# Altium PCB AU0006A.pcbdoc
Units mil, origin at the board's own origin, x right, y up, seen from the top; angles counter-clockwise.
Board outline 6752.1 x 6043.45 mil, 4 copper layers (Top Layer, GND, PWR, Bottom Layer), stack 39.556 mil thick; 12 components, 40 nets, 194 pads, 0 vias.
Unrouted connection lines stored in the file: 38.
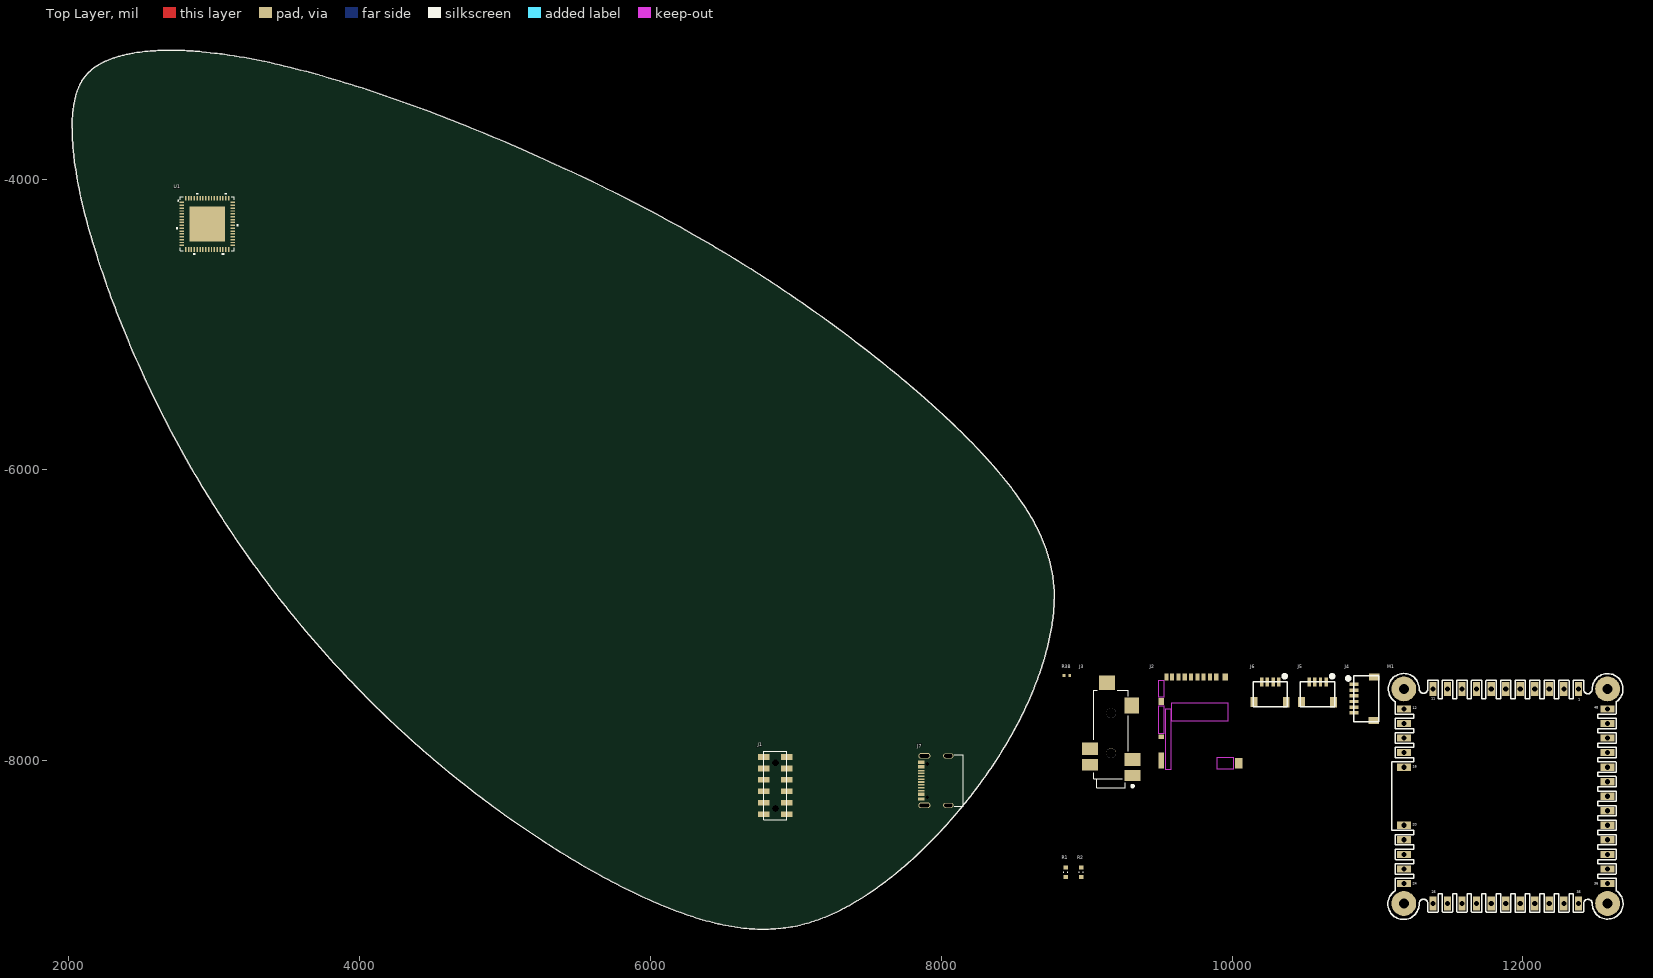
[diagram p0: Top Layer view]
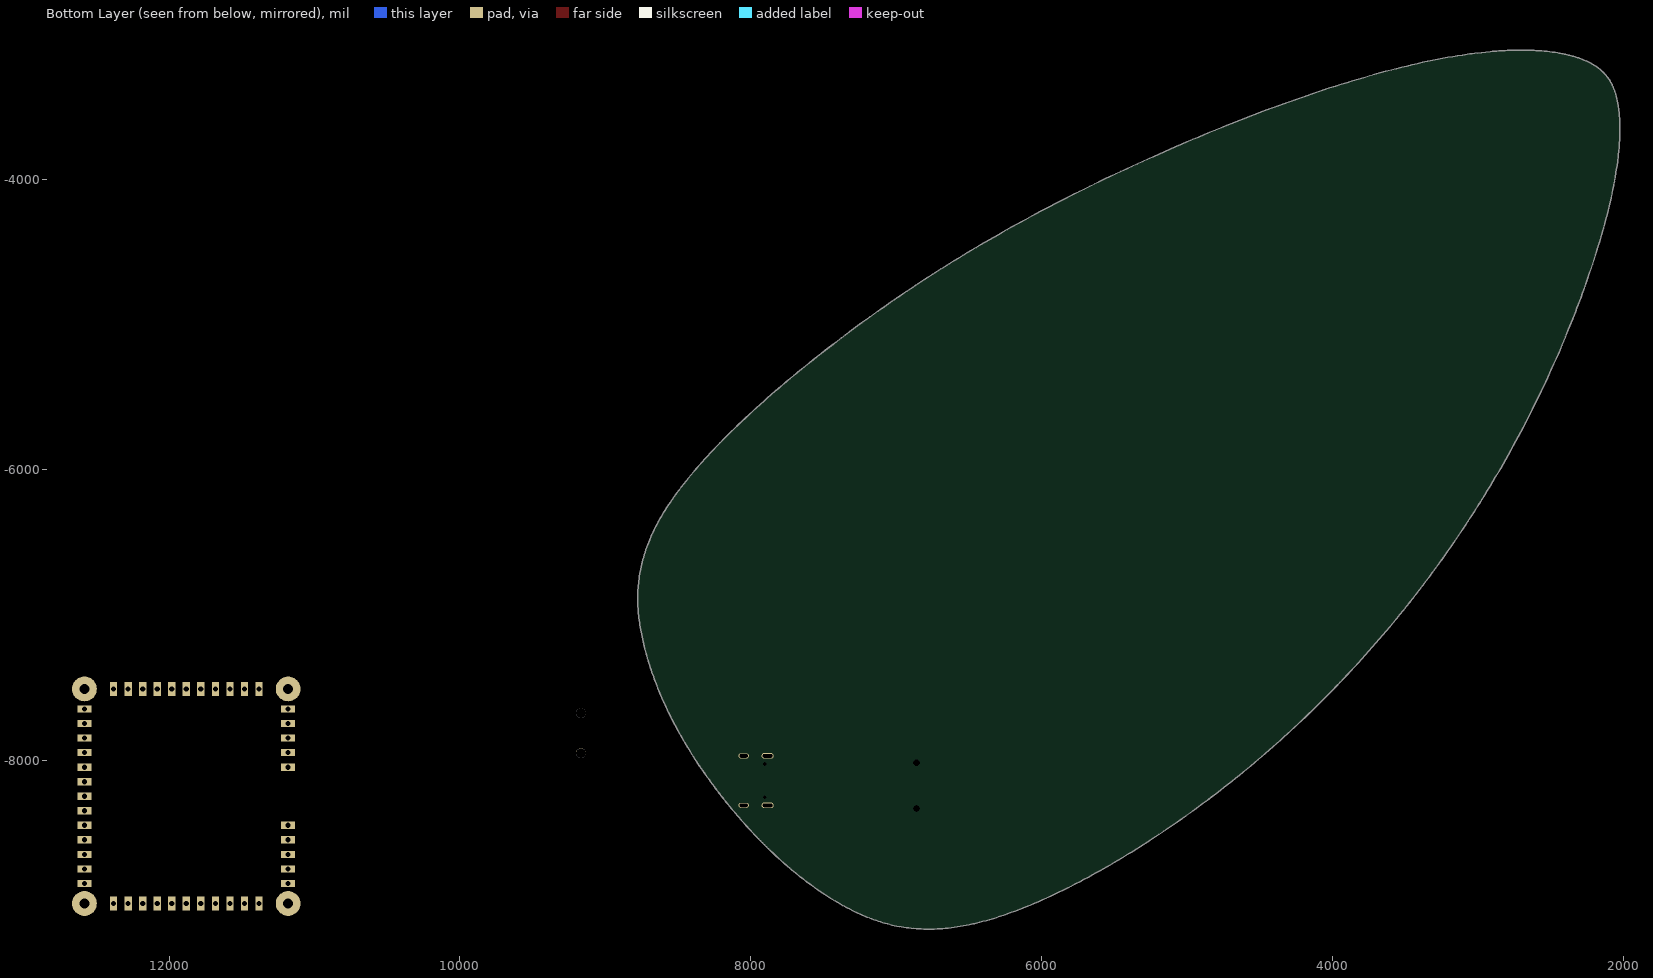
[diagram p1: Bottom Layer view, seen from below]

## Layer stack, top to bottom
Top Solder: solder mask 0.4, Solder Resist, Dk 3.5
Top Layer: signal copper 1.4
Dielectric 1: prepreg 2.8, PP-006, Dk 4.1
GND: signal copper 1.378
Dielectric1: dielectric 28.4, FR-4, Dk 4.8
PWR: signal copper 1.378
Dielectric 2: prepreg 2.8, PP-006, Dk 4.1
Bottom Layer: signal copper 1.4
Bottom Solder: solder mask 0.4, Solder Resist, Dk 3.5

## Board outline
795 vertices, not listed, extent 2025.34,-9156.87 8777.44,-3113.42

## Design rules (kind name [scope] priority, off if disabled: settings)
Clearance [All] p1: gap=5 ignorepadtopadclearanceinfootprint=FALSE except(8: Arc-Poly Track-Poly SMDPad-Poly THPad-Poly Via-Poly Fill-Poly Poly-Poly)
ComponentClearance ComponentClearance_1 [HasFootprint('ER-TFT1.54-1')] p1: gap=0 collisioncheckmode=3 verticalgap=0 showdistances=FALSE
ComponentClearance [All] p2: gap=10 collisioncheckmode=3 verticalgap=10 showdistances=FALSE
Height [All] p1: minheight=0 maxheight=5000 prefheight=500
PlaneClearance [All] p1: clearance=10
PolygonConnect PolygonConnect_2 [InNet('GND')] p1: thpad.connectstyle=Direct thpad.reliefconductorwidth=10 thpad.reliefentries=4 thpad.polygonreliefangle="90 Angle" thpad.airgapwidth=10 smdpad.connectstyle=Relief smdpad.reliefconductorwidth=10 smdpad.reliefentries=4 smdpad.polygonreliefangle="90 Angle" smdpad.airgapwidth=10 via.connectstyle=Direct via.reliefconductorwidth=10 via.reliefentries=4 via.polygonreliefangle="90 Angle" via.airgapwidth=10
PolygonConnect PolygonConnect_1 [IsVia] p2: connectstyle=Direct reliefconductorwidth=10 reliefentries=4 polygonreliefangle="90 Angle" airgapwidth=10
PolygonConnect [All] p3: connectstyle=Relief reliefconductorwidth=10 reliefentries=4 polygonreliefangle="90 Angle" airgapwidth=5
RoutingVias [All] p1: holewidth=12 width=26 viastyle="Through Hole" minholewidth=6 minwidth=6 maxholewidth=50 maxwidth=75
SilkToSolderMaskClearance SilkscreenOverComponentPads [IsPad] p1: minsilkscreentomaskgap=10 clearancetoexposedcopper=TRUE
SolderMaskExpansion [All] p1: expansion=4 istentingtop=FALSE
Width [All] p1: maxlimit=200 minlimit=5 preferedwidth=5
26 further rules are at their usual default settings.

## Classes and differential pairs
component class AU0005A_TOP_LEVEL: J1 J2 J3 J4 J5 J6 J7 M1 R1 R2 R38
component class U_ADC_IN: U1

## Components (designator, comment, footprint, x,y, rotation, side; value= is the part's Value field where it differs from the comment)
J1 "87759-1250" 87759-1250 6860,-8170 r90 top
J2 "DM3AT-SF-PEJM5" DM3AT-SF-PEJM5 9765.44,-8054.04 r0 top
J3 "SJ-43516-SMT" CUI_SJ-43516-SMT 9168.44,-7819.04 r90 top
J4 "SM6B-SRSS-TB(LF)(SN)" SM06B-SRSS-TB(LF)(SN) 10907.44,-7572.04 r90 top
J5 "SM04B-SRSS-TB(LF)(SN)" SM04B-SRSS-TB(LF)(SN) 10588.44,-7527.04 r0 top
J6 "SM04B-SRSS-TB(LF)(SN)" SM04B-SRSS-TB(LF)(SN) 10262.44,-7527.04 r0 top
J7 "=Value" 12402012E212A 8151.57,-8135.53 r90 top
M1 "SUPERMONKEY" SUPERMONKEY 11881.44,-8243.04 r0 top
R1 "5.1k" R0603_0.55MM_MD 8856.44,-8765.04 r90 top
R2 "5.1k" R0603_0.55MM_MD 8963.44,-8765.04 r90 top
R38 "10k" R0402_0.40MM_MD 8864.44,-7414.04 r0 top
U1 "AK5558VN" AK5558VN 2954,-4308 r0 top

## Footprints (in the part's own frame and the unit in brackets; to place one, negate y for a bottom-side part, rotate by r counter-clockwise, add the part's x,y. Pads: shape width x height; smd on the part's side, far side on the other; paste and mask are expansions set on the pad)
87759-1250 [mm] "CONN HEADER 12POS 2MM VERT SMD"
  rect 1x2 smd: 1(-5,-2) 2(-5,2) 3(-3,-2) 4(-3,2) 5(-1,-2) 6(-1,2) 7(1,-2) 8(1,2) 9(3,-2) 10(3,2) 11(5,-2) 12(5,2)
  round 0 hole 1.2 unplated: M1(-4,0) M2(4,0)
  silkscreen extent -5.92,-2.02 5.97,2.03, body extent -5.92,-2.75 5.98,2.75, height 6.45
12402012E212A [mm] "USB-C  2.0"
  round 0 hole 0.65: 71(2.89,6.28) ALIGN1(-2.89,6.28)
  rect 0.575x1.15 smd: A1B12(-3.2,7.355) A4B9(-2.4,7.355) B1A12(3.2,7.355) B4A9(2.4,7.355)
  rect 0.275x1.15 smd: A5(-1.25,7.355) A6(-0.25,7.355) A7(0.25,7.355) A8(1.25,7.355) B5(1.75,7.355) B6(0.75,7.355) B7(-0.75,7.355) B8(-1.75,7.355)
  oval 1x2.1 hole 0.6 slot 1.7 at 90 deg: M1(-4.32,6.78) M2(4.32,6.78)
  oval 0.9x1.8 hole 0.6 slot 1.4 at 90 deg: M3(-4.32,2.6) M4(4.32,2.6)
  silkscreen extent -4.47,-0.03 4.47,1.52, body extent -4.47,-0.02 4.47,7.58, height 3.27
AK5558VN [mil] "IC ADC, Audio 32 bit 768k DSD, PCM 64-QFN (9x9)"
  rect 31.68x10 smd paste+0 mask+0: 1(-176.16,147.64) 2(-176.16,127.95) 3(-176.16,108.27) 4(-176.16,88.58) 5(-176.16,68.9) 6(-176.16,49.21) 7(-176.16,29.53) 8(-176.16,9.84) 9(-176.16,-9.84) 10(-176.16,-29.53) 11(-176.16,-49.21) 12(-176.16,-68.9) 13(-176.16,-88.58) 14(-176.16,-108.27) 15(-176.16,-127.95) 16(-176.16,-147.64) 33(176.16,-147.64) 34(176.16,-127.95) 35(176.16,-108.27) 36(176.16,-88.58) 37(176.16,-68.9) 38(176.16,-49.21) 39(176.16,-29.53) 40(176.16,-9.84) 41(176.16,9.84) 42(176.16,29.53) 43(176.16,49.21) 44(176.16,68.9) 45(176.16,88.58) 46(176.16,108.27) 47(176.16,127.95) 48(176.16,147.64)
  rect 10x31.68 smd paste+0 mask+0: 17(-147.64,-176.16) 18(-127.95,-176.16) 19(-108.27,-176.16) 20(-88.58,-176.16) 21(-68.9,-176.16) 22(-49.21,-176.16) 23(-29.53,-176.16) 24(-9.84,-176.16) 25(9.84,-176.16) 26(29.53,-176.16) 27(49.21,-176.16) 28(68.9,-176.16) 29(88.58,-176.16) 30(108.27,-176.16) 31(127.95,-176.16) 32(147.64,-176.16) 49(147.64,176.16) 50(127.95,176.16) 51(108.27,176.16) 52(88.58,176.16) 53(68.9,176.16) 54(49.21,176.16) 55(29.53,176.16) 56(9.84,176.16) 57(-9.84,176.16) 58(-29.53,176.16) 59(-49.21,176.16) 60(-68.9,176.16) 61(-88.58,176.16) 62(-108.27,176.16) 63(-127.95,176.16) 64(-147.64,176.16)
  rect 242x242 smd paste-120.5 mask+0: 65(0,0)
  silkscreen extent -212,-212 212,212, body extent -180,-180 180,180, height 39
CUI_SJ-43516-SMT [mm]
  rect 2x2.8 smd: 1(-7.15,-3.7) 6(-5.25,3.7)
  rect 2.8x2.6 smd: 2(5.05,-3.6)
  rect 2.2x2.8 smd: 3(-2.45,3.7) 4(-4.35,-3.7)
  rect 2.6x2.8 smd: 5(9.05,0.75)
  round 1.7 hole 1.7 unplated: ""(-3.25,0) ""(3.75,0)
  silkscreen extent -9.25,-3.95 7.75,3, body extent -9.45,-4.5 7.75,4.5, height 5.08
DM3AT-SF-PEJM5 [mm] "Hirose DM3AT-SF-PEJM5 uSD connector - Normal Mount"
  rect 0.7x1.2 smd: 1(3.2,16.05) 2(2.1,16.05) 3(1,16.05) 4(-0.1,16.05) 5(-1.2,16.05) 6(-2.3,16.05) 7(-3.4,16.05) 8(-4.5,16.05) CDB(-5.45,16.05)
  rect 1x0.8 smd: CDA(-6.4,5.55)
  rect 1x2.8 smd: M(-6.4,1.4)
  rect 1x1.2 smd: M(-6.4,11.75) M(4.75,16.05)
  rect 1.3x1.9 smd: M(7.1,0.95)
  Top Layer keep-out region: -4.648,8.35 5.325,8.35 5.325,11.4 -4.648,11.4
  Top Layer keep-out region: -5.7,-0.1 -4.7,-0.1 -4.7,10.4 -5.7,10.4
  Top Layer keep-out region: -6.9,6.172 -5.9,6.172 -5.9,10.922 -6.9,10.922
  Top Layer keep-out region: -6.9,12.573 -5.9,12.573 -5.9,15.325 -6.9,15.325
  Top Layer keep-out region: 3.275,0 6.275,0 6.275,1.9 3.275,1.9
  body extent -6.49,0 7.36,16.15, height 1.68
R0402_0.40MM_MD [mm] "Resistor 0402 Medium Density"
  rect 0.45x0.55 smd: 1(-0.5,0) 2(0.5,0)
  body extent -0.5,-0.25 0.5,0.25, height 0.4
R0603_0.55MM_MD [mm] "Resistor 0603 Medium Density"
  rect 0.7x0.85 smd: 1(-0.825,0) 2(0.825,0)
  silkscreen extent -0.1,-0.33 0.1,0.33, body extent -0.8,-0.4 0.8,0.4, height 0.55
SM04B-SRSS-TB(LF)(SN) [mm] "CONN HEADR SH 4POS SIDE 1MM TIN"
  rect 0.6x1.55 smd: 1(-1.5,1.769) 2(-0.5,1.769) 3(0.5,1.769) 4(1.5,1.769)
  rect 1.2x1.8 smd: M1(2.8,-1.769) M2(-2.8,-1.719)
  silkscreen extent -3,-2.56 2.97,3.05, body extent -3,-2.64 3,2.31, height 2.91
SM06B-SRSS-TB(LF)(SN) [mm] "CONN HEADR SH 6POS SIDE 1MM TIN"
  rect 0.6x1.55 smd: 1(-2.5,1.769) 2(-1.5,1.769) 3(-0.5,1.769) 4(0.5,1.769) 5(1.5,1.769) 6(2.5,1.769)
  rect 1.2x1.8 smd: M1(3.8,-1.769) M2(-3.8,-1.719)
  silkscreen extent -4,-2.56 3.97,3.05, body extent -4,-2.44 4,2.51, height 2.97
SUPERMONKEY [mil]
  rect 50x95 hole 36: 1(500,737.5) 2(400,737.5) 3(300,737.5) 4(200,737.5) 5(100,737.5) 6(0,737.5) 7(-100,737.5) 8(-200,737.5) 9(-300,737.5) 10(-400,737.5) 11(-500,737.5) 25(-500,-737.5) 26(-400,-737.5) 27(-300,-737.5) 28(-200,-737.5) 29(-100,-737.5) 30(0,-737.5) 31(100,-737.5) 32(200,-737.5) 33(300,-737.5) 34(400,-737.5) 35(500,-737.5)
  round 170 hole 70: 2(-700,-737.5) 2(-700,737.5) 2(700,-737.5) 2(700,737.5)
  rect 95x50 hole 36: 12(-700,600) 13(-700,500) 14(-700,400) 15(-700,300) 16(-700,200) 20(-700,-200) 21(-700,-300) 22(-700,-400) 23(-700,-500) 24(-700,-600) 36(700,-600) 37(700,-500) 38(700,-400) 39(700,-300) 40(700,-200) 41(700,-100) 42(700,0) 43(700,100) 44(700,200) 45(700,300) 46(700,400) 47(700,500) 48(700,600)
  Top Layer lines w5: -700,-600 -699.68,-600.32 ; -700,-400 -686.73,-386.73 ; -700,-300 -697,-303 ; -700,200 -699.88,199.88 ; -700,400 -698.35,401.65 ; -409.45,-728.05 -400,-737.5 ; 100,-737.5 103,-734.5 ; 500,-737.5 505,-732.5 ; 696.57,-396.57 700,-400
  Top Layer lines w20: 498,735.5 500,737.5
  silkscreen extent -810,-847 807,844

## Part data
J1: "CONN HEADER 12POS 2MM VERT SMD", Color=Black, Manufacturer="Molex Connector Corporation", Supplier Part Number 1=WM18653-ND, Category="Connectors, Interconnects", ComponentLink1Description=http://www.molex.com/pdm_docs/sd/877591250_sd.pdf, ComponentLink1URL=http://www.molex.com/pdm_docs/sd/877591250_sd.pdf, Connector Type="Header, Unshrouded", Contact Finish=Gold, Contact Finish Thickness="15µin (0.38µm)", Contact Mating Length="0.150\" (3.81mm)", Contact Type="Male Pin", Fastening Type=-, Features="Board Guide", Manufacturer Part Number=87759-1250, Mounting Type="Surface Mount", Number of Positions=12, Number of Positions Loaded=All, Number of Rows=2, Packaging=Tube, Pitch="0.079\" (2.00mm)", Pricing 1="1=2.07, 10=1.823, 100=1.2155, 500=0.9724, 1000=0.80709 (USD)", RoHS="RoHS Compliant", Row Spacing="0.079\" (2.00mm)", Stock 1=1595, Supplier 1=Digi-Key, Termination=Solder
J2: "CONN MICRO SD R/A PUSH-PUSH SMD", Manufacturer="Hirose Electric Co Ltd", Supplier Part Number 1=HR1964CT-ND, Card Type="Secure Digital - microSD™", Category="Connectors, Interconnects", ComponentLink1Description=http://www.hirose.co.jp/cataloge_hp/e60900232.pdf, ComponentLink1URL=http://www.hirose.co.jp/cataloge_hp/e60900232.pdf, Connector Type="Connector and Ejector", Contact Finish=Gold, Contact Finish Thickness=-, Ejector Side=-, Features=Switch, Height Above Board="0.066\" (1.68mm)", Insertion, Removal Method="Push In, Push Out", Manufacturer Part Number=DM3AT-SF-PEJM5, Mounting Feature="Normal, Standard - Top", Mounting Type="Surface Mount, Right Angle", Number of Positions="10 (8 + 2)", Packaging="Cut Tape (CT)", Pricing="1=2.83, 10=2.72, 25=2.4932, 50=2.3798, 100=2.2664, 250=1.98312, 500=1.92648 (USD)", RoHS="RoHS Compliant", Stock=28699, Supplier 1=Digi-Key
J3: "Conn 3.5MM Audio Jack F 6 POS Solder RA SMD 6 Terminal 1 Port", Manufacturer="CUI Devices", Manufacturer Part Number=SJ-43516-SMT-TR, Package="3.5MM SMD R/A", Availability=Available, Price=$1.24
J4: library part SM06B-SRSS-TB(LF)(SN), "6 Positions Header, Shrouded Connector 0.039\" (1.00mm) Surface Mount, Right Angle Tin", Colour=Natural, Contact Resistance=40mR, Current Rating=1A, Flammability Rating="UL94 V-0", Housing Colour=Beige, Insulation Resistance=100MR, Manufacturer=JST, Max Operating Temperature=85°C, Max Voltage Rating (AC)=50V, Min Operating Temperature=-25°C, Supplier Part Number 1=455-1806-1-ND, ComponentLink1Description=https://datasheet.ciiva.com/11752/0900766b8082f544-11752176.pdf, ComponentLink1URL=https://datasheet.ciiva.com/11752/0900766b8082f544-11752176.pdf, ComponentLink2Description=https://datasheet.ciiva.com/16217/sm06b-srss-tblfsn-16217552.pdf, ComponentLink2URL=https://datasheet.ciiva.com/16217/sm06b-srss-tblfsn-16217552.pdf, ComponentLink3Description=https://datasheet.ciiva.com/26894/getdatasheetpartid-490708-26894951.pdf, ComponentLink3URL=https://datasheet.ciiva.com/26894/getdatasheetpartid-490708-26894951.pdf, ComponentLink4Description=https://datasheet.ciiva.com/26894/getdatasheetpartid-639890-26894680.pdf, ComponentLink4URL=https://datasheet.ciiva.com/26894/getdatasheetpartid-639890-26894680.pdf, ComponentLink5Description=https://datasheet.ciiva.com/8052/91630-8052281.pdf, ComponentLink5URL=https://datasheet.ciiva.com/8052/91630-8052281.pdf, ComponentLink6Description=https://datasheet.ciiva.com/712/esr-712571.pdf, ComponentLink6URL=https://datasheet.ciiva.com/712/esr-712571.pdf, ComponentLink7Description=https://datasheet.ciiva.com/712/esr-712572.pdf, ComponentLink7URL=https://datasheet.ciiva.com/712/esr-712572.pdf, ComponentLink8Description=https://datasheet.ciiva.com/730/esr-730671.pdf, ComponentLink8URL=https://datasheet.ciiva.com/730/esr-730671.pdf, Connector Type="Male Pin", Contact Material="Copper,Copper Alloy", Contact Plating=Copper,Tin,Lead, Depth=4.95mm, Gender=Male, Housing Material=Polyamide, Lead Free="Lead Free", Lead Pitch=1mm, Length=8mm, Manufacturer Part Number=SM06B-SRSS-TB(LF)(SN), Material=Polyamide, Max Current Rating=1A, Max Voltage Rating (DC)=50V, Mount="Surface Mount", Number of Contacts=6, Number of Positions=6, Number of Rows=1, Orientation="Right Angle", Packaging="Tape and Reel", Pitch=1mm, Pricing 1="1=0.83, 10=0.782, 100=0.5996, 500=0.5214, 1000=0.4301 (USD)", REACH SVHC="No SVHC", Stock 1=40560, Supplier 1=Digi-Key, Termination=Solder, Voltage Rating=50V, Voltage Rating (AC)=50V
J5 J6: "Conn Shrouded Header HDR 4 POS 1mm Solder RA SMD T/R", Colour=Natural, Contact Resistance=40mR, Housing Colour=Beige, Manufacturer=JST, Max Current Rating=1A, Max Operating Temperature=85°C, Max Voltage Rating (AC)=50V, Min Operating Temperature=-25°C, Supplier Part Number 1=455-1804-1-ND, ComponentLink1Description=https://datasheet.ciiva.com/26894/getdatasheetpartid-499363-26894945.pdf, ComponentLink1URL=https://datasheet.ciiva.com/26894/getdatasheetpartid-499363-26894945.pdf, ComponentLink2Description=https://datasheet.ciiva.com/26894/getdatasheetpartid-640736-26894676.pdf, ComponentLink2URL=https://datasheet.ciiva.com/26894/getdatasheetpartid-640736-26894676.pdf, ComponentLink3Description=https://datasheet.ciiva.com/16487/jstsm04b-srss-tb-lf-sn-16487222.pdf, ComponentLink3URL=https://datasheet.ciiva.com/16487/jstsm04b-srss-tb-lf-sn-16487222.pdf, Connector Type="Male Pin", Contact Material="Copper Alloy", Contact Plating=Copper,Tin, Depth=4.95mm, Housing Material=Polyamide, Lead Free="Lead Free", Length=6mm, Manufacturer Part Number=SM04B-SRSS-TB(LF)(SN), Max Voltage Rating (DC)=50V, Mount="Surface Mount", Number of Contacts=4, Number of Positions=4, Number of Rows=1, Orientation="Right Angle", Packaging="Tape and Reel", Pitch=0.039inch, Pricing 1="1=0.61, 10=0.569, 100=0.436, 500=0.37914, 1000=0.31279 (USD)", Stock 1=43886, Supplier 1=Digi-Key, Termination=Solder
J7: library part 12402012E212A, Manufacturer=Amphenol, Supplier Part Number 1=523-12402012E212A, Category=Connectors, Manufacturer Part Number=12402012E212A, Pricing="1=0.98000, 10=0.77400, 50=0.77400, 100=0.67300, 1000=0.53800, 10000=0.43700 (USD)", RoHS=No, Stock 1=6869, Supplier 1=Mouser
R1 R2: library part ERJ-3EKF5101V, "RES 5.1K OHM 1/10W 1% 0603 SMD", Limiting Element Voltage=75, Manufacturer="Panasonic Electronic Components", Maximum Overload Voltage=150, Maximum Working Voltage=22.6V, Package="0603 (1608 Metric)", Package Power="0603  (0.1W)", Power (Watts)="0.1W- 1/10W", Ratings=AEC-Q200, Sort Value=5100, Sort Value Package=603_5100, Supplier Package=0603, Supplier Part Number 1=P5.10KHCT-ND, Temperature Coefficient=±100ppm/°C, Tolerance=±1%, Category=Resistors, ComponentLink1Description="Internal Datasheet", ComponentLink1URL="datasheets\Panasonic Electronic Components\AOA0000CE2.pdf", ComponentLink2Description="External Datasheet", ComponentLink2URL=http://industrial.panasonic.com/www-data/pdf/AOA0000/AOA0000CE2.pdf, Composition="Thick Film", Features=-, Height=0.55MM, Manufacturer Part Number=ERJ-3EKF5101V, Number of Terminations=2, Packaging="Cut Tape (CT)", Resistance (Ohms)=5.1k, Size / Dimension="0.063\" L x 0.031\" W (1.60mm x 0.80mm)", Substitution Notes="5.1k , ±1% , 0603 , AEC-Q200", Supplier 1=Digi-Key
R38: library part ERJ-2RKF1002X, "RES 10K OHM 1/10W 1% 0402 SMD", Limiting Element Voltage=50, Manufacturer="Panasonic Electronic Components", Maximum Overload Voltage=100, Maximum Working Voltage=31.6V, Package="0402 (1005 Metric)", Package Power="0402  (0.1W)", Power (Watts)="0.1W- 1/10W", Ratings=AEC-Q200, Sort Value=10000, Sort Value Package=402_10000, Supplier Package=0402, Supplier Part Number 1=P10.0KLCT-ND, Temperature Coefficient=±100ppm/°C, Tolerance=±1%, Category=Resistors, ComponentLink1Description="Internal Datasheet", ComponentLink1URL="datasheets\Panasonic Electronic Components\AOA0000CE2.pdf", ComponentLink2Description="External Datasheet", ComponentLink2URL=http://industrial.panasonic.com/www-data/pdf/AOA0000/AOA0000CE2.pdf, Composition="Thick Film", Features=-, Height=0.40MM, Manufacturer Part Number=ERJ-2RKF1002X, Number of Terminations=2, Packaging="Cut Tape (CT)", Resistance (Ohms)=10k, Size / Dimension="0.039\" L x 0.020\" W (1.00mm x 0.50mm)", Substitution Notes="10k , ±1% , 0402 , AEC-Q200", Supplier 1=Digi-Key
U1: "IC ADC, Audio 32 bit 768k DSD, PCM 64-QFN (9x9)", Manufacturer="AKM/Asahi Kasei Microdevices", Supplier Device Package="64-QFN (9x9)", Category="ADCs/DACs - Special Purpose", Manufacturer Part Number=AK5558VN, Mounting Type="Surface Mount", Type=DEV

## Nets (pads, with @x,y where several pads share a name; then routed paths per layer and width w, separated by ;. In a path a pad name is that pad's centre, name@x,y a point inside that pad or via, vN(x,y) a via of type N, cw(c..) or ccw(c..) an arc to the next point about the centre after c; other vN are vias at no path point)
+3.3v: J2.4 R38.1
+IO: J4.6
+POT: J5.1 J6.1
ADC_LRCLK: M1.47
ADC_MCLK: M1.14
ADC_RST: M1.39
ADC_SCLK: M1.48
ADC_TDM: M1.46
COMMON: J4.5 J4.M1 J4.M2
GND: J2.6 J2.CDA J2.M J5.2 J5.M1 J5.M2 J6.2 J6.M1 J6.M2 J7.A1B12 J7.B1A12 J7.M1 J7.M2 J7.M3 J7.M4 R1.1 R2.1
NetJ1_1: J1.1
NetJ1_2: J1.2
NetJ1_3: J1.3
NetJ1_4: J1.4
NetJ1_5: J1.5
NetJ1_6: J1.6
NetJ1_7: J1.7
NetJ1_8: J1.8
NetJ1_9: J1.9
NetJ1_10: J1.10
NetJ1_11: J1.11
NetJ1_12: J1.12
NetJ7_A4B9,B4A9: J7.A4B9 J7.B4A9
NetJ7_A5: J7.A5 R2.2
NetJ7_A6,B6: J7.A6 J7.B6
NetJ7_A7,B7: J7.A7 J7.B7
NetJ7_B5: J7.B5 R1.2
P0: J4.1
P1: J4.2
P2: J4.3
P3: J4.4
POT: J5.3 J6.3
SD_CD: J2.CDB M1.24 R38.2
SD_CLK: J2.5 M1.25
SD_CMD: J2.3 M1.30
SD_D0: J2.7 M1.29
SD_D1: J2.8 M1.28
SD_D2: J2.1 M1.27
SD_D3: J2.2 M1.26
SW: J5.4 J6.4
pads on no net: J1.M1 J1.M2 J3. J3.1 J3.2 J3.3 J3.4 J3.5 J3.6 J7.71 J7.A8 J7.ALIGN1 J7.B8 M1.1 M1.2 M1.3 M1.4 M1.5 M1.6 M1.7 M1.8 M1.9 M1.10 M1.11 M1.12 M1.13 M1.15 M1.16 M1.20 M1.21 M1.22 M1.23 M1.31 M1.32 M1.33 M1.34 M1.35 M1.36 M1.37 M1.38 M1.40 M1.41 M1.42 M1.43 M1.44 M1.45 U1.1 U1.2 U1.3 U1.4 U1.5 U1.6 U1.7 U1.8 U1.9 U1.10 U1.11 U1.12 U1.13 U1.14 U1.15 U1.16 U1.17 U1.18 U1.19 U1.20 U1.21 U1.22 U1.23 U1.24 U1.25 U1.26 U1.27 U1.28 U1.29 U1.30 U1.31 U1.32 U1.33 U1.34 U1.35 U1.36 U1.37 U1.38 U1.39 U1.40 U1.41 U1.42 U1.43 U1.44 U1.45 U1.46 U1.47 U1.48 U1.49 U1.50 U1.51 U1.52 U1.53 U1.54 U1.55 U1.56 U1.57 U1.58 U1.59 U1.60 U1.61 U1.62 U1.63 U1.64 U1.65

## Silkscreen, mask and mechanical layers (free items; w line width, h text height)
Top Overlay:
  drawing of 794 lines, arcs and shapes, not listed
[8] Board Outline:
  drawing of 2587 lines, arcs and shapes, not listed

## Text inside footprints (layer, text, board x,y; h text height)
J2: [1] 3D Body Top "LOCK" at 9494.77,-8121.95 h9.84; [1] 3D Body Top "OVERSTROKE" at 9436.7,-8091.44 h9.84; [1] 3D Body Top "CARD EJECT" at 9440.64,-8279.43 h9.84
M1: Top Overlay "25" at 11371.44,-8918.04 h30; Top Overlay "36" at 12491.44,-8858.04 h30; Top Overlay "35" at 12371.44,-8918.04 h30; Top Overlay "24" at 11241.44,-8858.04 h30; Top Overlay "20" at 11243.44,-8453.04 h30; Top Overlay "16" at 11243.44,-8054.04 h30; Top Overlay "12" at 11243.44,-7653.04 h30; Top Overlay "11" at 11368.44,-7588.04 h30; Top Overlay "1" at 12379.44,-7593.04 h30; Top Overlay "48" at 12491.44,-7648.04 h30
U1: [13] Assembly Top "*" at 2781.19,-4175.52 h50